# Altium PCB PCB1.PcbDoc
Units mm, origin at the board's own origin, x right, y up, seen from the top; angles counter-clockwise.
Board outline 53.09 x 50.93 mm, 2 copper layers (Top Layer, Bottom Layer); 6 components, 16 nets, 62 pads, 0 vias.
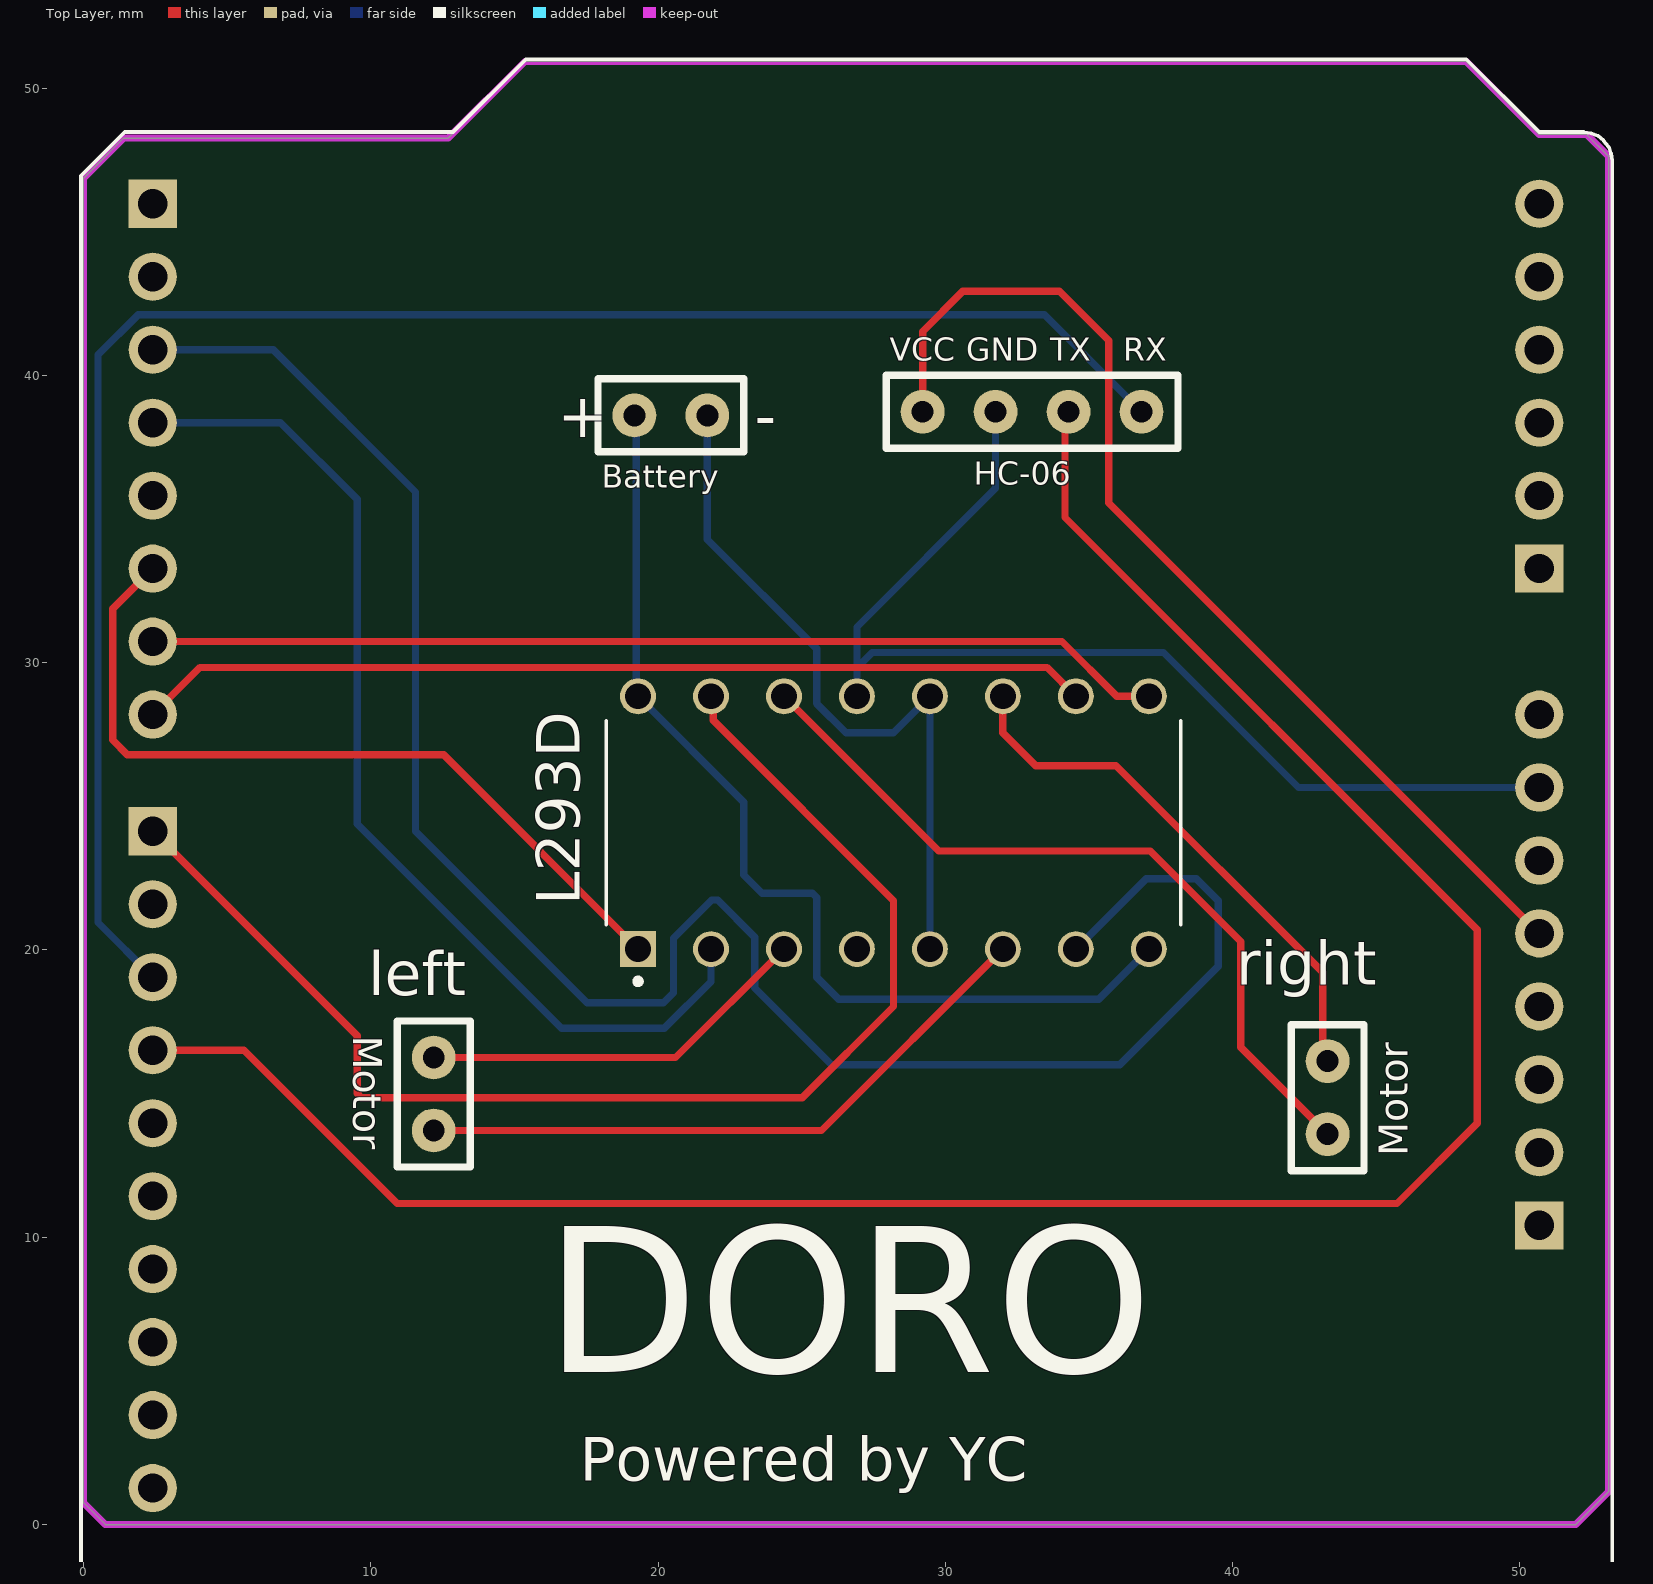
[diagram p0: Top Layer view]
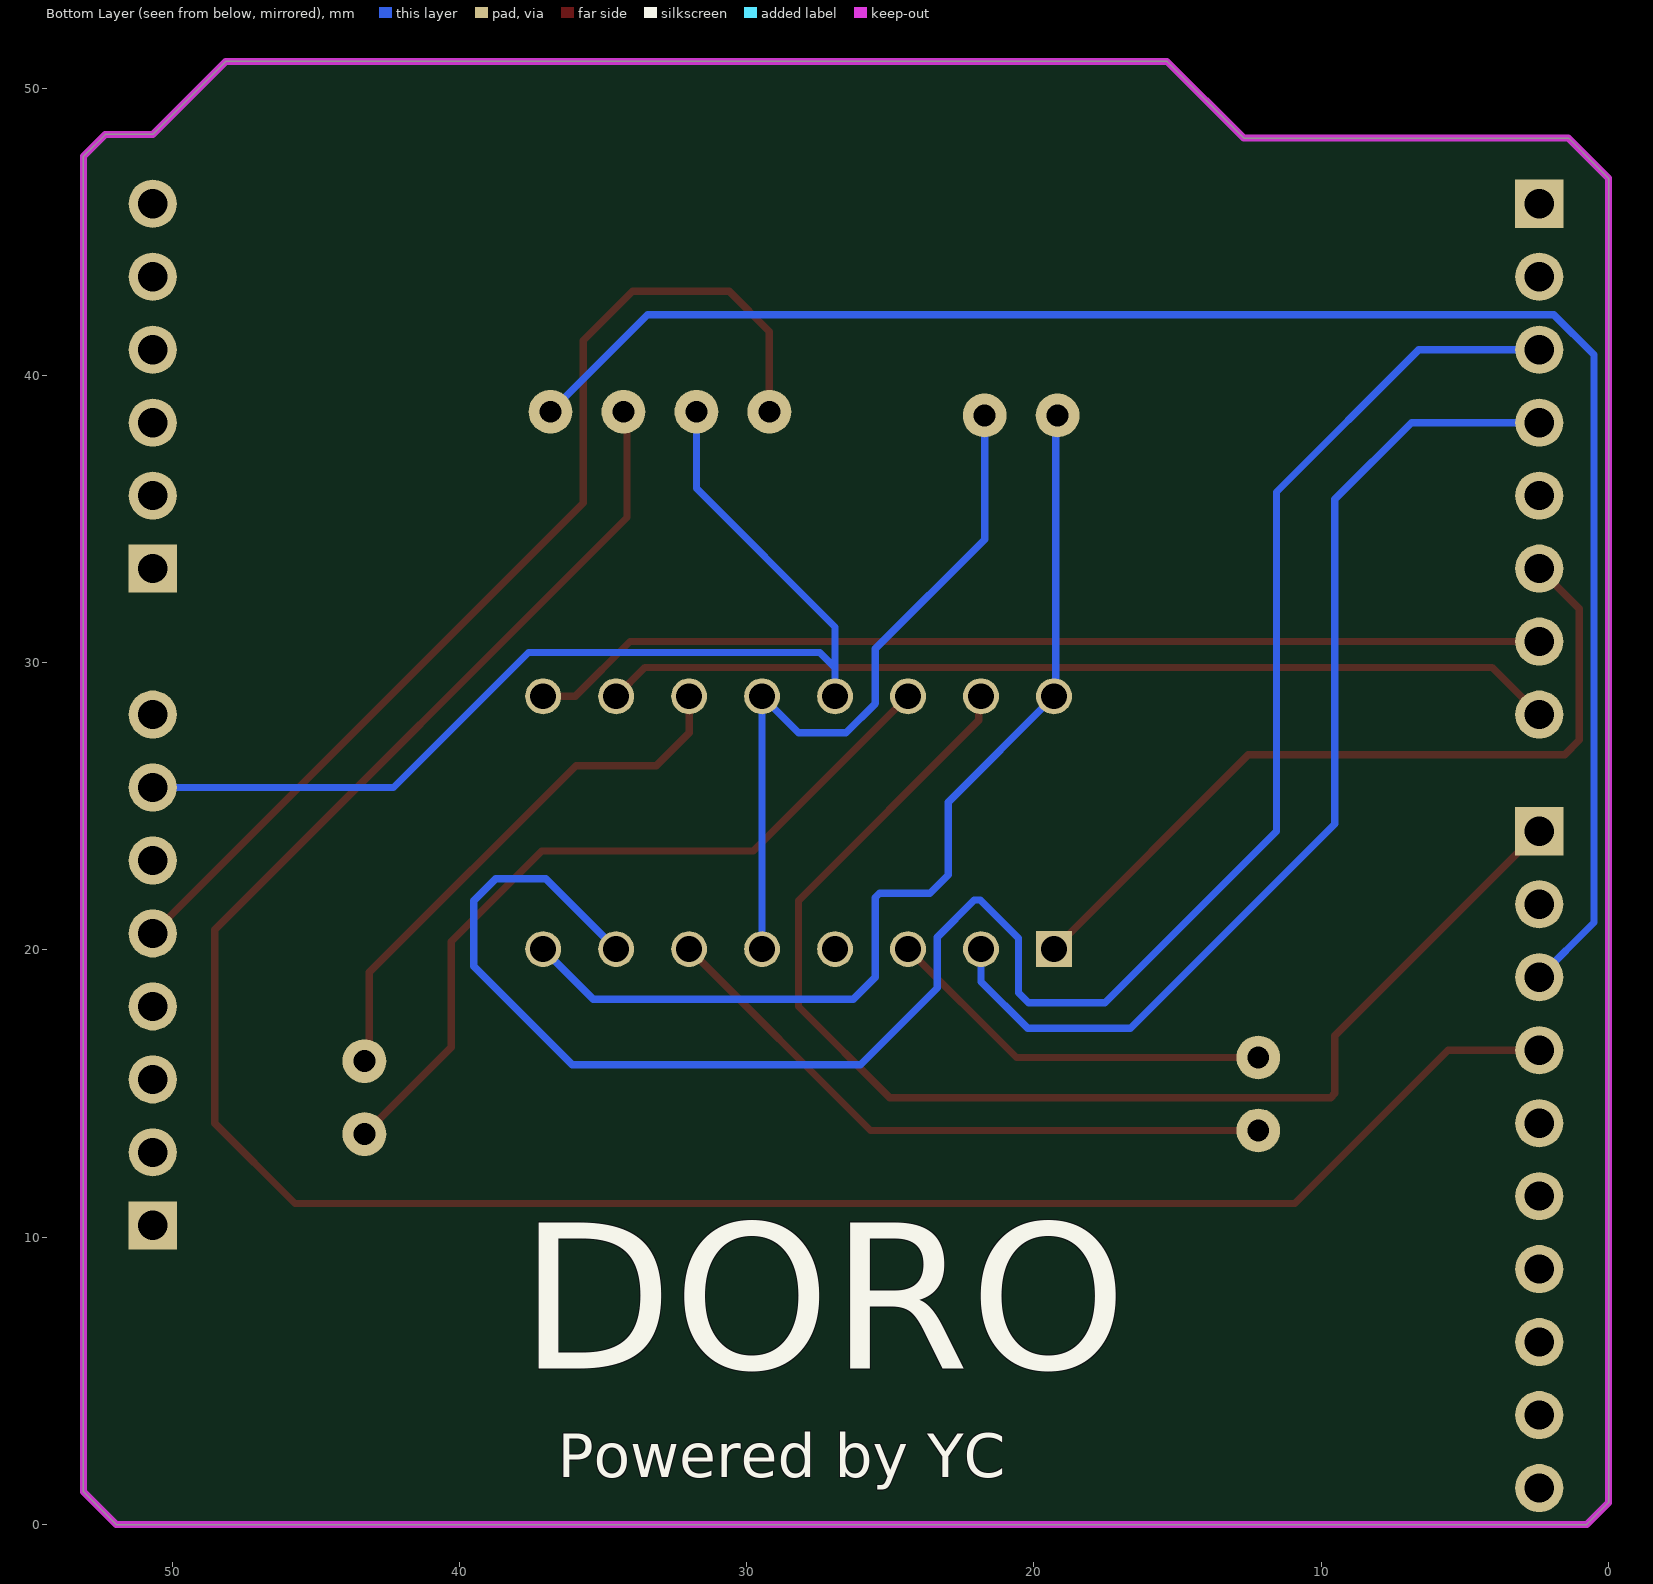
[diagram p1: Bottom Layer view, seen from below]

## Layer stack, top to bottom
Top Solder: solder mask 0.0102, Solder Resist, Dk 3.5
Top Layer: signal copper 0.0356
Dielectric 1: dielectric 0.32, FR-4, Dk 4.8
Bottom Layer: signal copper 0.0356
Bottom Solder: solder mask 0.0102, Solder Resist, Dk 3.5

## Board outline
0,0.762 0.762,0 51.943,0 53.086,1.143 53.086,47.625 52.324,48.387 50.673,48.387 48.133,50.927 15.367,50.927 12.7,48.26 1.397,48.26 0.381,47.244 0,46.863

## Design rules (kind name [scope] priority, off if disabled: settings)
Clearance [All] p1: gap=0.254 ignorepadtopadclearanceinfootprint=FALSE except(0: Arc-Hole Track-Hole SMDPad-Hole THPad-Hole Via-Hole Fill-Hole Poly-Hole Region-Hole Text-Hole)
PolygonConnect [All] p1: connectstyle=Relief reliefconductorwidth=0.254 reliefentries=4 polygonreliefangle="90 Angle" airgapwidth=0.254
RoutingVias [All] p1: holewidth=0.711 width=1.27 viastyle="Through Hole" minholewidth=0.711 minwidth=1.27 maxholewidth=0.711 maxwidth=1.27
SolderMaskExpansion [All] p1: expansion=0.102 istentingtop=FALSE
Width [All] p1: maxlimit=0.254 minlimit=0.254 preferedwidth=0.254
30 further rules are at their usual default settings.

## Classes and differential pairs
component class Sheet1: L293D left right

## Components (designator, comment, footprint, x,y, rotation, side; value= is the part's Value field where it differs from the comment)
"Arduino UNO" "uno" uno 53.213,-17.526 r90 top
Battery "battery" BATTERY 19.177,38.608 r0 top
HC-06 "HC06" HC06 29.21,38.735 r0 top
L293D "L293D" DIP880W50P254L2000H510Q16 28.194,24.429 r90 top
left "-" MOTOR 12.192,16.256 r270 top
right "-" MOTOR 43.307,13.589 r90 top

## Footprints (in the part's own frame and the unit in brackets; to place one, negate y for a bottom-side part, rotate by r counter-clockwise, add the part's x,y. Pads: shape width x height; smd on the part's side, far side on the other; paste and mask are expansions set on the pad)
BATTERY [mil]
  round 60 hole 30: 0(0,0) 1(100,0)
  silkscreen extent -50,-50 150,50, body extent -50,-50 153,48, height 331
DIP880W50P254L2000H510Q16 [mm]
  rect 1.25x1.25 / inner round 1.25 / far side rect 1.25x1.25 hole 0.9: 1(-4.4,8.89)
  round 1.25 hole 0.9: 2(-4.4,6.35) 3(-4.4,3.81) 4(-4.4,1.27) 5(-4.4,-1.27) 6(-4.4,-3.81) 7(-4.4,-6.35) 8(-4.4,-8.89) 9(4.4,-8.89) 10(4.4,-6.35) 11(4.4,-3.81) 12(4.4,-1.27) 13(4.4,1.27) 14(4.4,3.81) 15(4.4,6.35) 16(4.4,8.89)
  silkscreen extent -5.62,-10 3.55,10, body extent -4.62,-10 4.62,10, height 5.1
HC06 [mil]
  round 60 hole 30: 0(0,0) 1(100,0) 2(200,0) 3(300,0)
  silkscreen extent -50,-50 350,50, body extent -50,-50 350,48, height 331
MOTOR [mil]
  round 60 hole 30: 0(0,0) 1(100,0)
  silkscreen extent -50,-50 150,50, body extent -50,-50 153,48, height 331
uno [mil]
  round 66 hole 40: 3V3(1400,100) 5V(1500,100) A1(2100,100) A2(2200,100) A3(2300,100) A4(2400,100) A4(SDA)(840,2000) A5(2500,100) A5(SCL)(740,2000) AREF(940,2000) D1(2400,2000) D2(2300,2000) D3(2200,2000) D4(2100,2000) D5(2000,2000) D6(1900,2000) D7(1800,2000) D9(1540,2000) D10(1440,2000) D11(1340,2000) D12(1240,2000) D13(1140,2000) GND_1(1700,100) GND_2(1600,100) GND_3(1040,2000) IOREF(1200,100) RST(1300,100) VIN(1800,100)
  rect 66x66 / inner round 66 / far side rect 66x66 hole 40: A0(2000,100) D0(2500,2000) D8(1640,2000) P1(1100,100)
  round 129.92 hole 129.92 unplated: ""(-1950,4875) ""(-1950,4875)
  round 0 hole 129.92 unplated: ""(-1950,4875)
  oval 0x129.92 hole 129.92 unplated: ""(-1950,4875)
  silkscreen extent 0,0 2698,2098, body extent -241,0 2715,2100, height 467

## Part data
L293D: "Bipolar Motor Driver - Parallel 16-PowerDIP", Package="DIP-16 STMicroelectronics", Availability="In Stock", Check_prices=https://www.snapeda.com/parts/L293D/STMicroelectronics/view-part/?ref=eda, MF=STMicroelectronics, MP=L293D, Price=None, Purchase-URL=https://pricing.snapeda.com/search/part/L293D/?ref=eda, SnapEDA_Link=https://www.snapeda.com/parts/L293D/STMicroelectronics/view-part/?ref=snap
left right: library part motor

## Nets (pads, with @x,y where several pads share a name; then routed paths per layer and width w, separated by ;. In a path a pad name is that pad's centre, name@x,y a point inside that pad or via, vN(x,y) a via of type N, cw(c..) or ccw(c..) an arc to the next point about the centre after c; other vN are vias at no path point)
GND: Battery.1 L293D.5 L293D.12 | length 25.3
  Bottom Layer w0.254: Battery.1 21.717,34.29 25.527,30.48 25.527,28.575 26.543,27.559 28.194,27.559 L293D.12 L293D.5
"NetArduino UNO_5V": "Arduino UNO.5V" HC-06.0 | length 37.4
  Top Layer w0.254: HC-06.0 29.21,41.529 30.607,42.926 33.976,42.926 35.687,41.215 35.687,35.56 50.673,20.574
"NetArduino UNO_D2": "Arduino UNO.D2" L293D.7 | length 69.4
  Bottom Layer w0.254: 2.413,40.894 6.604,40.894 11.557,35.941 11.557,24.13 17.526,18.161 20.193,18.161 20.538,18.506 20.538,20.411 21.866,21.739 22.076,21.739 23.368,20.447 23.368,18.673 26.039,16.002 36.068,16.002 39.497,19.431 39.497,21.717 38.735,22.479 36.994,22.479 L293D.7
"NetArduino UNO_D3": "Arduino UNO.D3" L293D.2 | length 36.6
  Bottom Layer w0.254: 2.413,38.354 6.858,38.354 9.525,35.687 9.525,24.384 16.637,17.272 20.218,17.272 21.844,18.898 L293D.2
"NetArduino UNO_D5": "Arduino UNO.D5" L293D.1 | length 27.8
  Top Layer w0.254: 2.413,33.274 1.016,31.877 1.016,27.305 1.524,26.797 12.536,26.797 L293D.1
"NetArduino UNO_D6": "Arduino UNO.D6" L293D.9 | length 35.5
  Top Layer w0.254: 2.413,30.734 34.062,30.734 35.967,28.829 L293D.9
"NetArduino UNO_D7": "Arduino UNO.D7" L293D.10 | length 33.2
  Top Layer w0.254: 2.413,28.194 4.054,29.835 33.538,29.835 L293D.10
"NetArduino UNO_D8": "Arduino UNO.D8" L293D.15 | length 45.5
  Top Layer w0.254: 2.413,24.13 9.525,17.018 9.525,15.008 9.674,14.859 25.019,14.859 28.194,18.034 28.194,21.717 21.92,27.991 21.92,28.753 L293D.15
"NetArduino UNO_D10": "Arduino UNO.D10" HC-06.3 | length 60.8
  Bottom Layer w0.254: 2.413,19.05 0.508,20.955 0.508,40.713 1.908,42.113 33.452,42.113 HC-06.3
"NetArduino UNO_D11": "Arduino UNO.D11" HC-06.2 | length 80.2
  Top Layer w0.254: 2.413,16.51 5.588,16.51 10.922,11.176 45.72,11.176 48.514,13.97 48.514,20.701 34.163,35.052 34.163,38.608 HC-06.2
"NetArduino UNO_GND_1": "Arduino UNO.GND_1" HC-06.1 L293D.13 | length 37.8
  Bottom Layer w0.254: L293D.13 26.924,29.823 ; HC-06.1 31.75,36.068 26.924,31.242 26.924,29.823 ; 50.673,25.654 42.291,25.654 37.592,30.353 27.454,30.353 26.924,29.823
NetBattery_0: Battery.0 L293D.8 L293D.16 | length 36
  Top Layer w0.254: Battery.0 Battery.0@19.241,38.544 ; L293D.16@19.241,28.892 L293D.16
  Bottom Layer w0.254: Battery.0 19.241,38.544 19.241,28.892 L293D.16 22.987,25.146 22.987,22.606 23.622,21.971 25.378,21.971 25.527,21.822 25.527,19.05 26.289,18.288 35.343,18.288 L293D.8
NetL293D_3: L293D.3 left.0 | length 13.8
  Top Layer w0.254: left.0 20.611,16.256 L293D.3
NetL293D_6: L293D.6 left.1 | length 22.4
  Top Layer w0.254: left.1 25.691,13.716 L293D.6
NetL293D_11: L293D.11 right.1 | length 19
  Top Layer w0.254: L293D.11 32.004,27.559 33.147,26.416 35.941,26.416 43.134,19.223 43.134,16.302 right.1
NetL293D_14: L293D.14 right.0 | length 27.4
  Top Layer w0.254: L293D.14 29.767,23.446 37.133,23.446 40.282,20.297 40.282,16.614 right.0
pads on no net: "Arduino UNO.3V3" "Arduino UNO." "Arduino UNO.A0" "Arduino UNO.A1" "Arduino UNO.A2" "Arduino UNO.A3" "Arduino UNO.A4" "Arduino UNO.A4(SDA)" "Arduino UNO.A5" "Arduino UNO.A5(SCL)" "Arduino UNO.AREF" "Arduino UNO.D0" "Arduino UNO.D1" "Arduino UNO.D4" "Arduino UNO.D9" "Arduino UNO.D12" "Arduino UNO.D13" "Arduino UNO.GND_2" "Arduino UNO.GND_3" "Arduino UNO.IOREF" "Arduino UNO.P1" "Arduino UNO.RST" "Arduino UNO.VIN" L293D.4

## Keep-outs
Keep-Out Layer:
  lines w0.254: 0,0.762 0.762,0 2.54,0 44.831,0 51.943,0 53.086,1.143 53.086,47.625 52.324,48.387 50.673,48.387 48.133,50.927 15.367,50.927 12.7,48.26 1.397,48.26 0.381,47.244 0,46.863 0,0.762

## Silkscreen, mask and mechanical layers (free items; w line width, h text height)
Top Overlay:
  text "DORO" at 16.055,5.302 h6
  text "Powered by YC" at 17.272,1.524 h1.52
Bottom Overlay:
  text "DORO" at 37.92,5.429 h6
  text "Powered by YC" at 36.576,1.651 h1.52

## Text inside footprints (layer, text, board x,y; h text height)
Battery: Top Overlay "+" at 16.51,37.846 h1.52; Top Overlay "-" at 23.368,37.846 h1.52
HC-06: Top Overlay "VCC" at 28.067,40.513 h0.8; Top Overlay "GND" at 30.734,40.513 h0.8; Top Overlay "TX" at 33.655,40.513 h0.8; Top Overlay "RX" at 36.195,40.513 h0.8
left: Top Overlay "Motor" at 9.398,17.018 h1 r270
right: Top Overlay "Motor" at 46.101,12.827 h1 r90